# Altium PCB DSOBoard.PcbDoc
Units mil, origin at the board's own origin, x right, y up, seen from the top; angles counter-clockwise.
Board outline 2000 x 1300 mil, 2 copper layers (Top Layer, Bottom Layer); 39 components, 30 nets, 146 pads, 0 vias.
Unrouted connection lines stored in the file: 60.
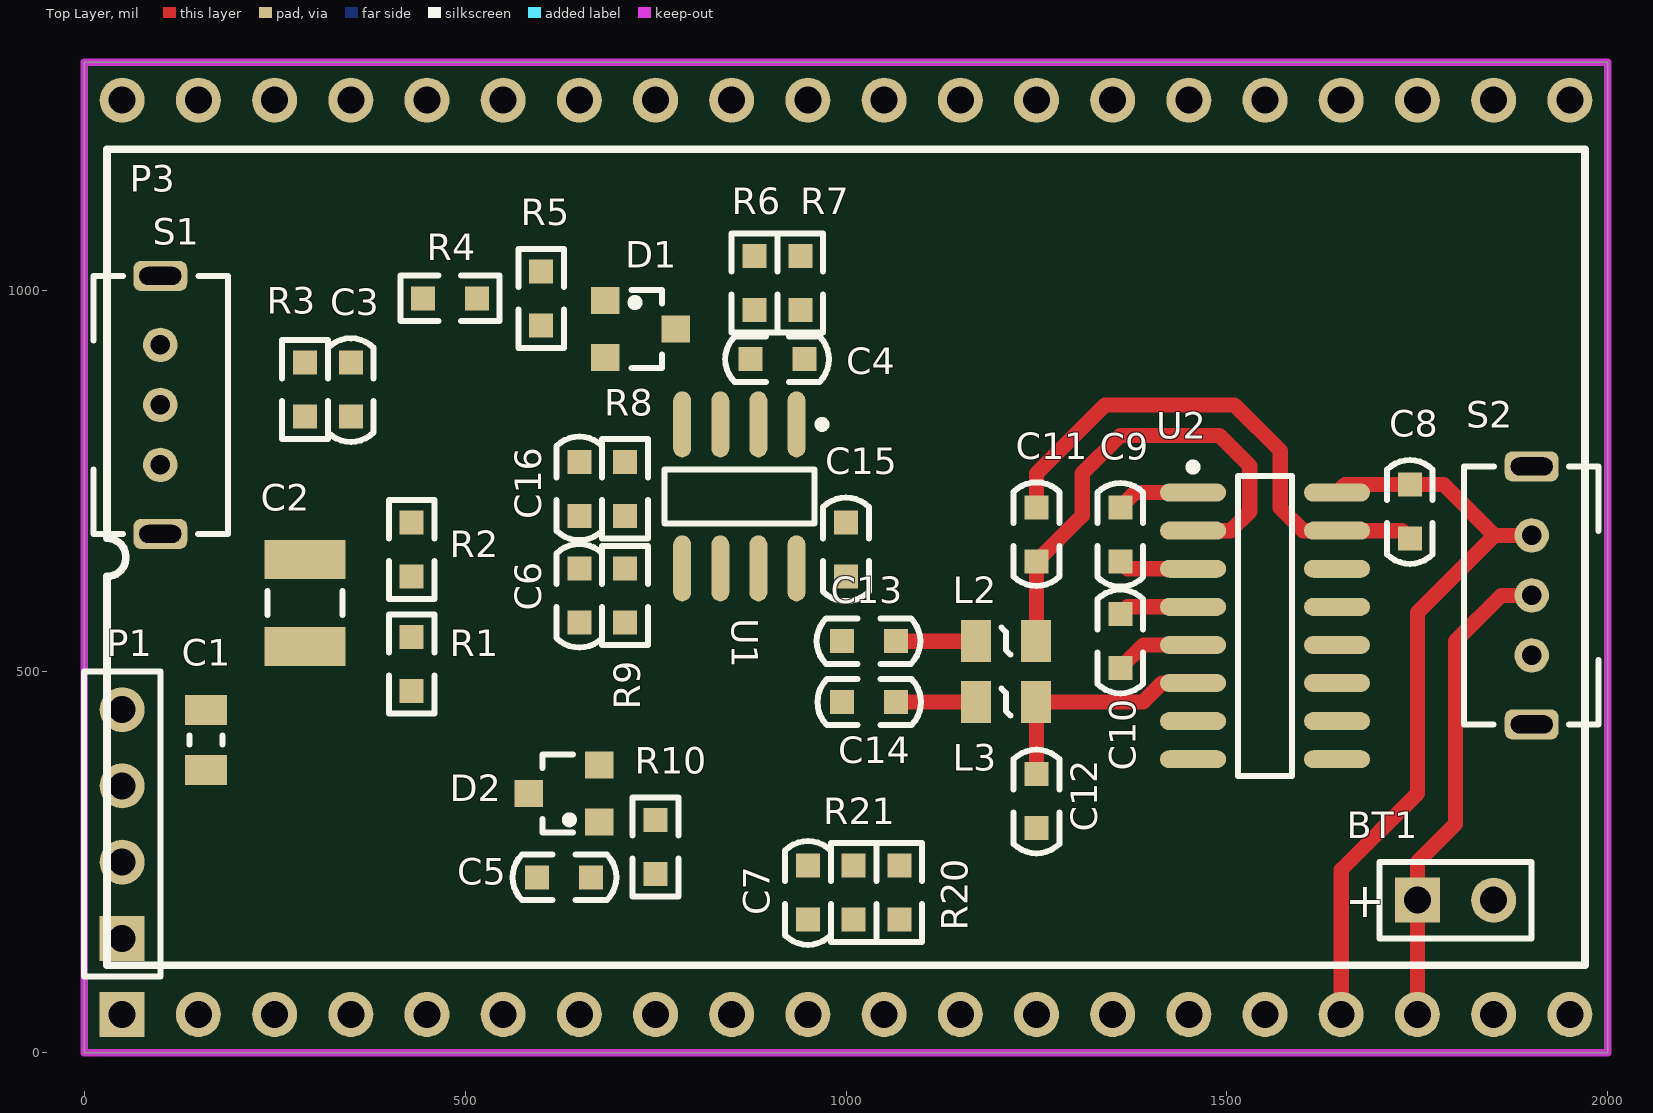
[diagram p0: Top Layer view]
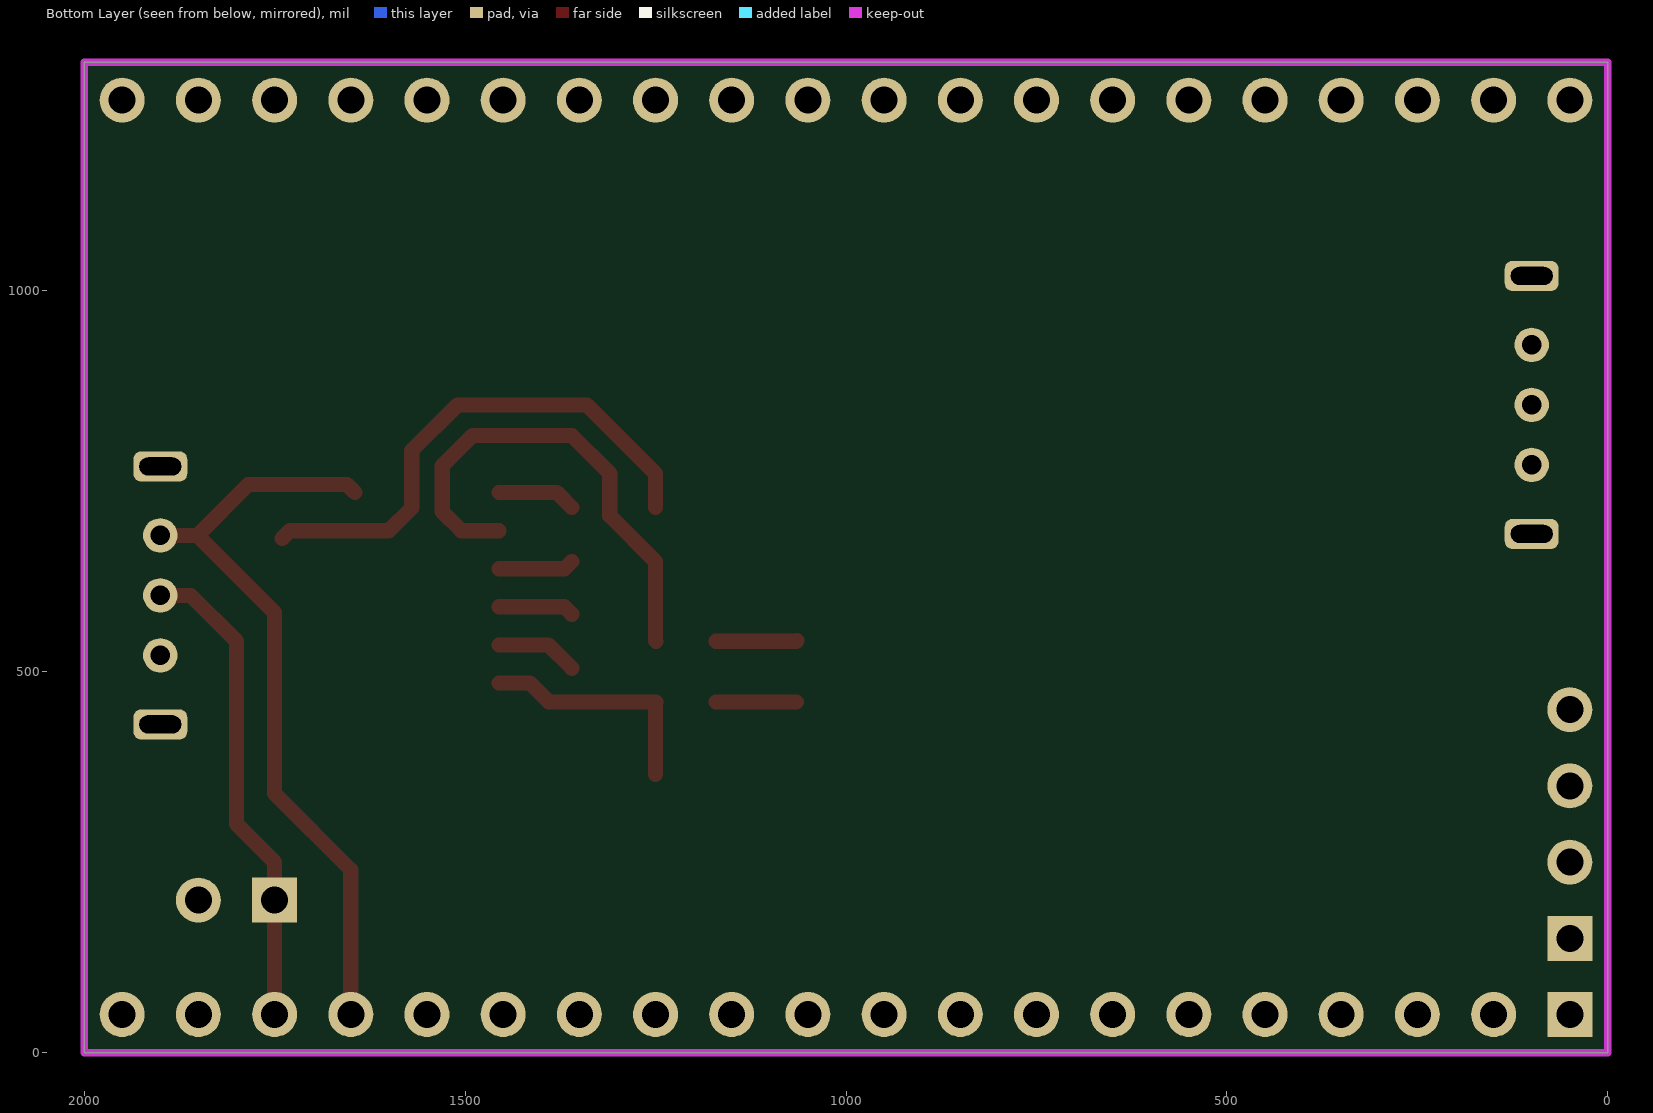
[diagram p1: Bottom Layer view, seen from below]

## Layer stack, top to bottom
Top Layer: signal copper 1.4
Dielectric: dielectric 12.6, FR-4, Dk 4.8
Bottom Layer: signal copper 1.4

## Board outline
0,0 2000,0 2000,1300 0,1300

## Design rules (kind name [scope] priority, off if disabled: settings)
Clearance Clearance_1 [InNamedPolygon('Bottom Layer-No Net')] p1: gap=15
Clearance [All] p2: gap=10
ComponentClearance [All] p1 off: gap=10 collisioncheckmode=3 verticalgap=10 showdistances=FALSE
MinimumSolderMaskSliver [All] p1: minsoldermaskwidth=8
PolygonConnect PolygonConnect_Via [IsVia] p1: connectstyle=Direct reliefconductorwidth=10 reliefentries=4 polygonreliefangle="90 Angle"
PolygonConnect [All] p2: connectstyle=Relief reliefconductorwidth=10 reliefentries=4 polygonreliefangle="90 Angle"
RoutingVias [All] p1: holewidth=24 width=48 viastyle="Through Hole" minholewidth=12 minwidth=24 maxholewidth=18 maxwidth=36
SilkscreenOverComponentPads [All] p1: minsilkscreentomaskgap=8
SolderMaskExpansion [All] p1: expansion=4
Width [All] p1: maxlimit=40 minlimit=8 preferedwidth=12
25 further rules are at their usual default settings.

## Components (designator, comment, footprint, x,y, rotation, side; value= is the part's Value field where it differs from the comment)
BT1 "Battery" BAT-2 1800,200 r0 top
C1 "Cap" 0805C 160,410 r90 top
C2 "Cap Var" C1210_N 290,590 r270 top
C3 "Cap" 0603C 350,870 r270 top
C4 "Cap" 0603C 910,910 r180 top
C5 "Cap" 0603C 630,230 r0 top
C6 "Cap" 0603C 650,600 r270 top
C7 "Cap" 0603C 950,210 r270 top
C8 "Cap" 0603C 1740,710 r270 top
C9 "Cap" 0603C 1360,680 r270 top
C10 "Cap" 0603C 1360,540 r270 top
C11 "Cap" 0603C 1250,680 r90 top
C12 "Cap" 0603C 1250,330 r270 top
C13 "Cap" 0603C 1030,540 r180 top
C14 "Cap" 0603C 1030,460 r0 top
C15 "Cap" 0603C 1000,660 r90 top
C16 "Cap" 0603C 650,740 r90 top
D1 "BAV99" SOT-23 730,950 r270 top
D2 "BAS40-4" SOT-23 630,340 r90 top
L2 "Inductor" 0805L 1210,540 r180 top
L3 "Inductor" 0805L 1210,460 r180 top
P1 "AIN" HDR1X4 50,150 r90 top
P3 "MiCore" MICORE 50,50 r90 top locked
R1 "Res3" 0603R 430,510 r270 top
R2 "Res3" 0603R 430,660 r270 top
R3 "Res3" 0603R 290,870 r270 top
R4 "Res3" 0603R 480,990 r0 top
R5 "Res3" 0603R 600,990 r270 top
R6 "Res3" 0603R 880,1010 r90 top
R7 "Res3" 0603R 940,1010 r90 top
R8 "Res3" 0603R 710,740 r270 top
R9 "Res3" 0603R 710,600 r90 top
R10 "Res3" 0603R 750,270 r270 top
R20 "Res3" 0603R 1070,210 r90 top
R21 "Res3" 0603R 1010,210 r270 top
S1 "SW-SPDT" SPDT_3S 100,850 r180 top
S2 "SW-SPDT" SPDT_3S 1900,600 r0 top
U1 "TL082" SO8 860,730 r270 top
U2 "SP3232" NSO16_N 1550,560 r0 top

## Footprints (in the part's own frame and the unit in brackets; to place one, negate y for a bottom-side part, rotate by r counter-clockwise, add the part's x,y. Pads: shape width x height; smd on the part's side, far side on the other; paste and mask are expansions set on the pad)
0603C [mm] "贴?"
  rect 0.8x0.8 smd: 1(-0.9,0) 2(0.9,0)
  silkscreen extent -1.72,-0.76 1.74,0.76, body extent -0.9,-0.4 0.9,0.4, height 0.8
0603R [mm] "贴?"
  rect 0.8x0.8 smd: 1(-0.9,0) 2(0.9,0)
  silkscreen extent -1.65,-0.76 1.65,0.76, body extent -0.9,-0.4 0.9,0.4, height 0.45
0805C [mm] "贴?"
  rect 1x1.4 smd: 1(-1,0) 2(1,0)
  silkscreen extent -0.15,-0.55 0.15,0.55, body extent -1.07,-0.7 1.07,0.7, height 0.8
0805L [mm] "贴?"
  rect 1x1.4 smd: 1(-1,0) 2(1,0)
  silkscreen extent -0.15,-0.45 0.15,0.45, body extent -1.07,-0.7 1.07,0.7, height 1
BAT-2 [mm] "Battery; 2 Leads"
  rect 1.5x1.5 hole 0.9: 1(-1.27,0)
  round 1.5 hole 0.9: 2(1.27,0)
  silkscreen extent -2.54,-1.27 2.54,1.27
C1210_N [mm] "Chip Capacitor, Body 3.2x2.5mm, IPC Medium Density"
  rect 1.3x2.7 smd: 1(-1.45,0) 2(1.45,0)
  silkscreen extent -0.4,-1.25 0.4,1.25, body extent -1.7,-1.35 1.7,1.35, height 1.5
HDR1X4 [mm] "Connector; Header; 4 Position"
  rect 1.5x1.5 hole 0.9: 1(0,0)
  round 1.5 hole 0.9: 2(2.54,0) 3(5.08,0) 4(7.62,0)
  silkscreen extent -1.27,-1.27 8.89,1.27
MICORE [mm] "MiCore"
  rect 1.5x1.5 hole 0.9: 1(0,0)
  round 1.5 hole 0.9: 2(0,-2.54) 3(0,-5.08) 4(0,-7.62) 5(0,-10.16) 6(0,-12.7) 7(0,-15.24) 8(0,-17.78) 9(0,-20.32) 10(0,-22.86) 11(0,-25.4) 12(0,-27.94) 13(0,-30.48) 14(0,-33.02) 15(0,-35.56) 16(0,-38.1) 17(0,-40.64) 18(0,-43.18) 19(0,-45.72) 20(0,-48.26) 21(30.48,-48.26) 22(30.48,-45.72) 23(30.48,-43.18) 24(30.48,-40.64) 25(30.48,-38.1) 26(30.48,-35.56) 27(30.48,-33.02) 28(30.48,-30.48) 29(30.48,-27.94) 30(30.48,-25.4) 31(30.48,-22.86) 32(30.48,-20.32) 33(30.48,-17.78) 34(30.48,-15.24) 35(30.48,-12.7) 36(30.48,-10.16) 37(30.48,-7.62) 38(30.48,-5.08) 39(30.48,-2.54) 40(30.48,0)
  silkscreen extent 1.64,-48.77 28.84,0.51, body extent -1.27,-50.22 31.75,1.27, height 14.05
NSO16_N [mm] "SOIC, 16-Leads, Body 9.9x3.9mm, Pitch 1.27mm, IPC Medium Density"
  oval 2.2x0.6 smd: 1(-2.4,4.445) 2(-2.4,3.175) 3(-2.4,1.905) 4(-2.4,0.635) 5(-2.4,-0.635) 6(-2.4,-1.905) 7(-2.4,-3.175) 8(-2.4,-4.445) 9(2.4,-4.445) 10(2.4,-3.175) 11(2.4,-1.905) 12(2.4,-0.635) 13(2.4,0.635) 14(2.4,1.905) 15(2.4,3.175) 16(2.4,4.445)
  silkscreen extent -2.52,-5 0.9,5.42, body extent -2,-5 2,5, height 1.75
SO8 [mm] "SOIC, 8-Leads, Body 4.9x3.9mm, Pitch 1.27mm, IPC Medium Density"
  oval 2.2x0.6 smd: 1(-2.4,1.905) 2(-2.4,0.635) 3(-2.4,-0.635) 4(-2.4,-1.905) 5(2.4,-1.905) 6(2.4,-0.635) 7(2.4,0.635) 8(2.4,1.905)
  silkscreen extent -2.52,-2.5 0.9,2.88, body extent -2,-2.5 2,2.5, height 1.75
SOT-23 [mm] "SOT-23"
  rect 0.9x0.95 smd: 1(-0.95,-1.175) 2(0.95,-1.175) 3(0,1.175)
  silkscreen extent -1.3,-0.3 1.3,0.73, body extent -1.3,-0.72 1.23,0.73, height 1.1
SPDT_3S [mm]
  rrect50% 1.8x1 hole 0.6 slot 1.4 at 0 deg: 0(0,4.3) 4(0,-4.3)
  round 1.15 hole 0.65: 1(0,2) 2(0,0) 3(0,-2)
  silkscreen extent -2.25,-4.3 2.23,4.3, body extent -2.25,-4.3 2.25,4.28, height 5

## Part data
BT1: "Multicell Battery"
C1 C3 C4 C5 C6 C7 C8 C9 C10 C11 C12 C13 C14 C15 C16: "Capacitor"
C2: "Variable or Adjustable Capacitor"
D1: "SOT23 Silicon Planar High-Speed Switching Series Diode Pair"
D2: library part BAV99, "SOT23 Silicon Planar High-Speed Switching Series Diode Pair"
P1: library part "Header 4", "Header, 4-Pin"
P3: library part Mi, "MiCore核心板"
R1 R2 R3 R4 R5 R6 R7 R8 R9 R10 R20 R21: "Resistor"
S1 S2: "SPDT Subminiature Toggle Switch, Right Angle Mounting, Vertical Actuation"
U1: library part AD823AR, "Dual, 16MHz, Rail-to-Rail FET-Input Amplifier"
U2: library part MAX3232CSE, "3.0V TO 5.5V, Low-Power, up to 1Mbps, True RS-232 Transceiver Using Four 0.1礔 External Capacitor"

## Nets (pads, with @x,y where several pads share a name; then routed paths per layer and width w, separated by ;. In a path a pad name is that pad's centre, name@x,y a point inside that pad or via, vN(x,y) a via of type N, cw(c..) or ccw(c..) an arc to the next point about the centre after c; other vN are vias at no path point)
ADC_BAT: C7.2 P3.10 R20.1 R21.2
ADC_IN: C5.2 D2.1 P3.8 R10.2
AGND: C3.1 C5.1 C6.1 C13.2 C14.1 C15.1 C16.1 D2.3 P1.1 P1.2 P3.1 R3.1 R5.2
AVCC: C13.1 C15.2 D1.2 L2.2 U1.8 | length 106.4
  Top Layer w20: C13.1@1064.57,540.87 C13.1 L2.2
AVCC_3V3: C6.2 D2.2 P3.2 R9.1
AVEE: C14.2 C16.2 D1.3 L3.2 U1.4 | length 105.2
  Top Layer w20: C14.2 L3.2
GND: BT1.2 C7.1 C8.2 C11.2 C12.2 P3.20 R21.1 U2.15 | length 688.4
  Top Layer w20: C11.2 1250,760 1340,850 1510,850 1570,790 1570,715 1600,685 U2.15 1729.57,685 C8.2
NetC1_1: C1.1 C2.2 P1.3 R1.2 S1.1
NetC1_2: C1.2 P1.4
NetC2_1: C2.1 C3.2 R2.1 R3.2 S1.3
NetC4_1: C4.1 R7.1 R8.1 U1.1
NetC4_2: C4.2 R5.1 R6.1 U1.2
NetC9_1: C9.1 U2.1 | length 103.6
  Top Layer w20: C9.1 1379.57,735 U2.1
NetC9_2: C9.2 U2.3 | length 99.5
  Top Layer w20: C9.2 1369.57,635 U2.3
NetC10_1: C10.1 U2.4 | length 99.5
  Top Layer w20: C10.1 1369.57,585 U2.4
NetC10_2: C10.2 U2.5 | length 108.1
  Top Layer w20: C10.2 1390.43,535 U2.5
NetC11_1: C11.1 L2.1 U2.2 | length 647.2
  Top Layer w20: L2.1 1250,540.63 C11.1 1310,704.57 1310,760 1360,810 1490,810 1530,770 1530,710 1505,685 U2.2
NetC12_1: C12.1 L3.1 U2.6 | length 311.3
  Top Layer w20: C12.1 1250,459.37 L3.1 1390,460 1415,485 U2.6
NetD1_1: D1.1 R4.2 U1.3
NetP3_12: P3.12 P3.13
NetP3_14: P3.14 P3.15
NetP3_37: P3.37 P3.38
NetR1_1: R1.1 R2.2
NetR4_1: R4.1 S1.2
NetR6_2: R6.2 R7.2
NetR8_2: R8.2 R9.2 U1.5
NetR10_1: R10.1 U1.6 U1.7
VBAT: BT1.1 P3.18 S2.2 | length 635.6
  Top Layer w20: P3.18 BT1.1 1750,250 1800,300 1800,540 1860,600 S2.2
VCC: P3.16
VIN: C8.1 P3.17 R20.2 S2.1 U2.16 | length 999.6
  Top Layer w20: U2.16 1654.92,745.43 C8.1 1784.57,745.43 1851.26,678.74 ; P3.17 1650,240 1750,340 1750,577.48 1851.26,678.74 ; S2.1 1851.26,678.74
pads on no net: P3.3 P3.4 P3.5 P3.6 P3.7 P3.9 P3.11 P3.19 P3.21 P3.22 P3.23 P3.24 P3.25 P3.26 P3.27 P3.28 P3.29 P3.30 P3.31 P3.32 P3.33 P3.34 P3.35 P3.36 P3.39 P3.40 S1.0 S1.4 S2.0 S2.3 S2.4 U2.7 U2.8 U2.9 U2.10 U2.11 U2.12 U2.13 U2.14

## Keep-outs
Keep-Out Layer:
  the board outline again, w10

## Text inside footprints (layer, text, board x,y; h text height)
BT1: Top Overlay "+" at 1655.51,177.28 h45.28